# EAGLE board CT_schematic (EAGLE 7.6.0)

Size 100 x 80 mm. Coordinates in mm from the lower left corner, seen from the top.
Outline: 0,0 100,0 100,80 0,80 0,0
Copper layers (1*16): Top 0.035mm / dielectric 1.5mm / Bottom 0.035mm
Design rules "default": minimum track width 10mil, minimum drill 24mil, track to track 8mil, track to pad 8mil, pad to pad 8mil, via to via 8mil, smd to smd 8mil, copper to edge 40mil, drill to drill 8mil, minimum pad ring 10mil, minimum via ring 8mil, stop-mask expansion 4mil, vias tented up to drill 0mil, thermal gap 10mil

## Footprints (pad centres in the part's own frame; a part is rotated, then mirrored left to right if it is on the bottom)
C0603 = smd 0.8 x 0.8: 1 -0.762,0; 2 0.762,0
C0402 = smd 0.5 x 0.5: 1 -0.508,0; 2 0.508,0
C0805 = smd 1.2 x 1.3: 1 -1.016,0; 2 1.016,0
C1210 = smd 1.2 x 2.5: 1 -1.524,0; 2 1.524,0
C1206 = smd 1.3 x 1.6: 1 -1.524,0; 2 1.524,0
L0603 = smd 0.8 x 0.8: 1 -0.762,0; 2 0.762,0
DR1040 = smd 1.6 x 3.2: 1 -4.458,0; 2 4.458,0
L1210 = smd 1.2 x 2.5: 1 -1.524,0; 2 1.524,0
R0603 = smd 0.8 x 0.8: 1 -0.762,0; 2 0.762,0
UFQFPN48 = smd 0.559 x 0.305: 1 -3.375,2.751; 2 -3.375,2.251; 3 -3.375,1.75; 4 -3.375,1.25; 5 -3.375,0.75; 6 -3.375,0.25; 7 -3.375,-0.25; 8 -3.375,-0.75; 9 -3.375,-1.25; 10 -3.375,-1.75; 11 -3.375,-2.251; 12 -3.375,-2.751; 25 3.375,-2.751; 26 3.375,-2.251; 27 3.375,-1.75; 28 3.375,-1.25; 29 3.375,-0.75; 30 3.375,-0.25; 31 3.375,0.25; 32 3.375,0.75; 33 3.375,1.25; 34 3.375,1.75; 35 3.375,2.251; 36 3.375,2.751 | smd 0.305 x 0.559: 13 -2.751,-3.375; 14 -2.251,-3.375; 15 -1.75,-3.375; 16 -1.25,-3.375; 17 -0.75,-3.375; 18 -0.25,-3.375; 19 0.25,-3.375; 20 0.75,-3.375; 21 1.25,-3.375; 22 1.75,-3.375; 23 2.251,-3.375; 24 2.751,-3.375; 37 2.751,3.375; 38 2.251,3.375; 39 1.75,3.375; 40 1.25,3.375; 41 0.75,3.375; 42 0.25,3.375; 43 -0.25,3.375; 44 -0.75,3.375; 45 -1.25,3.375; 46 -1.75,3.375; 47 -2.251,3.375; 48 -2.751,3.375 | smd 5.588 x 5.588: 49 0,0
SOIC-8 = smd 1.6 x 0.6: 1 -2.7,1.905 | smd 1.55 x 0.6: 2 -2.7,0.635; 3 -2.7,-0.635; 4 -2.7,-1.905; 5 2.7,-1.905; 6 2.7,-0.635; 7 2.7,0.635; 8 2.7,1.905
TDFN-8/6MM = smd 0.3 x 0.75: 1 0,0; 2 0.5,0; 3 1,0; 4 1.5,0; 5 1.5,3; 6 1,3; 7 0.5,3; 8 0,3
182-009-MALE = drill 1.194 pad 1.524 octagon: 1 -5.537,10.923; 2 -2.769,10.923; 3 0,10.923; 4 2.769,10.923; 5 5.537,10.923; 6 -4.153,8.08; 7 -1.384,8.08; 8 1.384,8.08; 9 4.153,8.08 | hole 3.048: -12.446,9.501; 12.446,9.501
DFN-6 = smd 0.805 x 0.3: 1 -0.952,0.5; 2 -0.952,0; 3 -0.952,-0.5; 4 0.952,-0.5; 5 0.952,0; 6 0.952,0.5 | smd 0.61 x 1.42: 7 0,0
ABS07-32.768KHZ-7-T = smd 1.1 x 2.4: 1 -2.5,0; 2 0,0
ABLS-25.000MHZ-B2F-T = smd 5.6 x 2.8: 1 -3.81,0; 2 5.69,0
TSOT-23-5 = smd 1.3 x 0.62: 1 -1.31,0.95; 2 -1.31,0; 3 -1.31,-0.95; 4 1.31,-0.95; 5 1.31,0.95
DFN-8_DDB = smd 0.805 x 0.3: 1 -0.952,0.75; 2 -0.952,0.25; 3 -0.952,-0.25; 4 -0.952,-0.75; 5 0.952,-0.75; 6 0.952,-0.25; 7 0.952,0.25; 8 0.952,0.75 | smd 0.61 x 2.2: 9 0,0
DFN8_2X3MC = smd 0.813 x 0.305: 1 -1.398,0.75; 2 -1.398,0.25; 3 -1.398,-0.25; 4 -1.398,-0.75; 5 1.398,-0.75; 6 1.398,-0.25; 7 1.398,0.25; 8 1.398,0.75 | smd 1.753 x 1.549: 9 0,0
JST-2-SMD = smd 1 x 4.6: 1 -1,-3.7; 2 1,-3.7 | smd 1.6 x 3.4: NC1 -3.4,1.5; NC2 3.4,1.5
FCI_10118193-0001LF = smd 0.4 x 1.35: 1 -1.3,2.675; 2 -0.65,2.675; 3 0,2.675; 4 0.65,2.675; 5 1.3,2.675 | smd 1.6 x 1.4: 6 -3.2,2.45; 7 3.2,2.45 | smd 1.9 x 1.9: 8 -1.2,0; 9 1.2,0 | hole 0.5: -3.3,0; 3.3,0
SON-6 = smd 0.55 x 0.3: 1 -0.355,0.5 | smd 0.52 x 0.3: 2 -0.37,0; 3 -0.37,-0.5; 4 0.37,-0.5; 5 0.37,0; 6 0.37,0.5
SW_4-1437565-2 = smd 1.4 x 2.1: 1 -2.23,4.55; 2 -2.23,-4.55; 3 2.23,4.55; 4 2.23,-4.55
LGM67K-G1J2-24-Z = smd 0.8 x 1.4: A -2,0; C 0,0
NC7SZ125M5X = smd 1.3 x 0.7: 1 -1.3,0.95; 2 -1.3,0; 3 -1.3,-0.95; 4 1.3,-0.95; 5 1.3,0.95

## Placement (x,y rotation side)
C1  1e-06  [C0603]  -40.64,64.77 0 top  (outside the outline)
C2  1e-07  [C0603]  -44.45,64.77 0 top  (outside the outline)
C3  1e-07  [C0603]  -48.26,64.77 0 top  (outside the outline)
C4  1e-07  [C0603]  -52.07,64.77 0 top  (outside the outline)
C5  4.7e-06  [C0603]  -29.21,64.77 0 top  (outside the outline)
C6  1e-07  [C0603]  -55.88,64.77 0 top  (outside the outline)
C7  1e-07  [C0603]  -59.69,64.77 0 top  (outside the outline)
C8  1e-08  [C0603]  -63.5,64.77 0 top  (outside the outline)
C9  1e-06  [C0603]  -67.31,64.77 0 top  (outside the outline)
C10  1e-11  [C0402]  -57.15,69.85 0 top  (outside the outline)
C11  1e-11  [C0402]  -60.96,69.85 0 top  (outside the outline)
C12  1e-11  [C0402]  -64.77,69.85 0 top  (outside the outline)
C13  1e-11  [C0402]  -68.58,69.85 0 top  (outside the outline)
C14  1e-08  [C0402]  -72.39,69.85 0 top  (outside the outline)
C15  1e-08  [C0402]  -15.24,74.93 0 top  (outside the outline)
C16  1e-08  [C0402]  -19.05,74.93 0 top  (outside the outline)
C17  1e-06  [C0603]  -71.12,64.77 0 top  (outside the outline)
C18  1e-06  [C0603]  -15.24,69.85 0 top  (outside the outline)
C19  1e-07  [C0402]  -22.86,74.93 0 top  (outside the outline)
C20  1e-05  [C0805]  -40.64,53.34 0 top  (outside the outline)
C21  1e-05  [C0805]  -45.72,53.34 0 top  (outside the outline)
C22  1e-05  [C1210]  -69.85,45.72 0 top  (outside the outline)
C23  2.2e-06  [C0603]  -33.02,64.77 0 top  (outside the outline)
C24  2.2e-07  [C0603]  -36.83,64.77 0 top  (outside the outline)
C25  1e-07  [C0402]  -26.67,74.93 0 top  (outside the outline)
C26  1e-05  [C1206]  -22.86,53.34 0 top  (outside the outline)
C27  1e-05  [C1206]  -29.21,53.34 0 top  (outside the outline)
C28  1e-08  [C0402]  -30.48,74.93 0 top  (outside the outline)
F1  240.0  [L0603]  -19.05,69.85 0 top  (outside the outline)
I1  3.8e-06  [DR1040]  -19.05,27.94 0 top  (outside the outline)
I2  1e-05  [L1210]  -16.51,53.34 0 top  (outside the outline)
R1  10000.0  [R0603]  -30.48,59.69 0 top  (outside the outline)
R2  1000.0  [R0603]  -22.86,69.85 0 top  (outside the outline)
R3  1270.0  [R0603]  -26.67,69.85 0 top  (outside the outline)
R4  4700.0  [R0603]  -30.48,69.85 0 top  (outside the outline)
R5  2200.0  [R0603]  -34.29,69.85 0 top  (outside the outline)
R6  2200.0  [R0603]  -38.1,69.85 0 top  (outside the outline)
R7  2200.0  [R0603]  -41.91,69.85 0 top  (outside the outline)
R8  2200.0  [R0603]  -45.72,69.85 0 top  (outside the outline)
R9  10000.0  [R0603]  -35.56,59.69 0 top  (outside the outline)
R10  10000.0  [R0603]  -40.64,59.69 0 top  (outside the outline)
R11  10000.0  [R0603]  -45.72,59.69 0 top  (outside the outline)
R12  10000.0  [R0603]  -50.8,59.69 0 top  (outside the outline)
R13  10000.0  [R0603]  -55.88,59.69 0 top  (outside the outline)
R14  10000.0  [R0603]  -60.96,59.69 0 top  (outside the outline)
R15  10000.0  [R0603]  -66.04,59.69 0 top  (outside the outline)
R16  120.0  [R0603]  -49.53,69.85 0 top  (outside the outline)
R17  309473.68421053  [R0603]  -60.96,53.34 0 top  (outside the outline)
R18  1000000.0  [R0603]  -66.04,53.34 0 top  (outside the outline)
R19  100000.0  [R0603]  -71.12,53.34 0 top  (outside the outline)
R20  560000.0  [R0603]  -15.24,59.69 0 top  (outside the outline)
R21  10000.0  [R0603]  -71.12,59.69 0 top  (outside the outline)
R22  10000.0  [R0603]  -15.24,64.77 0 top  (outside the outline)
R23  18000.0  [R0603]  -20.32,64.77 0 top  (outside the outline)
R24  470000.0  [R0603]  -20.32,59.69 0 top  (outside the outline)
R25  120000.0  [R0603]  -25.4,59.69 0 top  (outside the outline)
R26  2000.0  [R0603]  -53.34,69.85 0 top  (outside the outline)
R27  10000.0  [R0603]  -25.4,64.77 0 top  (outside the outline)
U1  stm32f091cbu7  [UFQFPN48]  -46.99,38.1 0 top  (outside the outline)
U2  AT25160B-SSHL-T  [SOIC-8]  -66.04,27.94 0 top  (outside the outline)
U3  AT25256B-SSHL-T  [SOIC-8]  -24.13,38.1 0 top  (outside the outline)
U4  24AA08T-I/MNY  [TDFN-8/6MM]  -50.8,26.67 0 top  (outside the outline)
U5  MCP2562-E/SN  [SOIC-8]  -38.1,38.1 0 top  (outside the outline)
U6  182-009-113R531  [182-009-MALE]  -36.83,6.35 0 top  (outside the outline)
U7  Si7051-A20-IM  [DFN-6]  -40.64,73.66 0 top  (outside the outline)
U8  ABS07-32.768KHZ-7-T  [ABS07-32.768KHZ-7-T]  -49.53,46.99 0 top  (outside the outline)
U9  ABLS-25.000MHZ-B2F-T  [ABLS-25.000MHZ-B2F-T]  -26.67,46.99 0 top  (outside the outline)
U10  ltc3406es5  [TSOT-23-5]  -50.8,53.34 0 top  (outside the outline)
U11  LT3494AEDDB#TRMPBF  [DFN-8_DDB]  -34.29,74.93 0 top  (outside the outline)
U12  MCP73831T-2ACI/MC  [DFN8_2X3MC]  -49.53,73.66 0 top  (outside the outline)
U13  S2B-PH-SM4-TB(LF)(SN)  [JST-2-SMD]  -34.29,29.21 0 top  (outside the outline)
U14  10118193-0001LF  [FCI_10118193-0001LF]  -58.42,36.83 0 top  (outside the outline)
U15  TPS3895ADRYR  [SON-6]  -43.18,73.66 0 top  (outside the outline)
U16  4-1437565-2  [SW_4-1437565-2]  -67.31,6.35 0 top  (outside the outline)
U17  Q65110A2395  [LGM67K-G1J2-24-Z]  -58.42,45.72 0 top  (outside the outline)
U18  nc7sz125m5x  [NC7SZ125M5X]  -34.29,53.34 0 top  (outside the outline)

## Library data of the parts
C1-C28 F1 I1 I2 R1-R27 U1-U18 = circuit_tree

## Nets
CLK_CRYSTAL_U1_3: C10.1 U1.3 U8.1
CLK_CRYSTAL_U1_4: C11.1 U1.4 U8.2
CLK_CRYSTAL_U1_5: C12.1 U1.5 U9.1
CLK_CRYSTAL_U1_6: C13.1 U1.6 U9.2
GND: C1.2 C2.2 C3.2 C4.2 C5.2 C6.2 C7.2 C8.2 C9.2 C10.2 C11.2 C12.2 C13.2 C14.2 C15.2 C16.2 C17.2 C18.2 C19.2 C20.2 C21.1 C21.2 C22.2 C23.2 C24.2 C25.2 C26.2 C27.2 C28.2 R2.2 R9.2 R17.2 R23.2 R25.2 R26.2 U1.8 U1.23 U1.35 U1.47 U1.49 U2.4 U3.4 U4.4 U5.2 U5.8 U6.5 U7.2 U7.7 U10.2 U11.2 U11.9 U12.6 U12.9 U13.2 U14.5 U14.6 U14.7 U14.8 U14.9 U15.2 U17.C U18.1 U18.3
INPUT_USBPOWER_5V: C26.1 R27.2 U12.1 U12.2 U14.1
NET_U1_7: R4.1 U1.7 U18.4
NET_U1_9: C8.1 C9.1 F1.1 U1.9
NET_U1_22: R8.1 U1.22 U4.5
NET_U1_26: R7.1 U1.26 U4.6
NET_U1_30: R5.1 U1.30 U7.6
NET_U1_31: R6.1 U1.31 U7.1
NET_U1_44: R9.1 U1.44
NET_U1_45: R3.1 U1.45 U17.A
NET_U1_46: R1.1 U1.46 U16.3 U16.4
NET_U2_3: R10.1 U2.3
NET_U2_7: R12.1 U2.7
NET_U3_3: R13.1 U3.3
NET_U3_7: R15.1 U3.7
NET_U5_6: R16.2 U5.6
NET_U6_2: R16.2 U5.6 U6.2
NET_U6_3: R16.1 U5.7 U6.3
NET_U10_1: U10.1
NET_U10_3: I1.1 U10.3
NET_U10_5: R17.1 R18.1 U10.5
NET_U10_ATNET_3: I1.2 R18.2
NET_U11_1: I2.1 U11.1
NET_U11_5: R19.1 U11.5
NET_U11_6: R20.1 U11.6
NET_U11_8: C24.1 U11.8
NET_U12_5: R27.1 U12.5
NET_U12_8: R26.1 U12.8
NET_U15_1: R22.1 R23.1 U15.1
NET_U15_3: R24.2 R25.1 U15.3
NET_U15_4: R21.1 U15.4 U18.2
NET_U16_1: R2.1 U16.1 U16.2
PROC_CAN_RX: U1.32 U5.4
PROC_CAN_TX: U1.33 U5.1
PROC_SPI1_MISO: U1.16 U3.2
PROC_SPI1_MOSI: U1.17 U3.5
PROC_SPI1_NSS: R14.1 U1.14 U3.1
PROC_SPI1_SCK: U1.15 U3.6
PROC_SPI2_MISO: U1.27 U2.2
PROC_SPI2_MOSI: U1.28 U2.5
PROC_SPI2_NSS: R11.1 U1.25 U2.1
PROC_SPI2_SCK: U1.21 U2.6
VCC_S1_3V7: C20.1 C22.1 C27.1 I2.2 R19.2 U10.4 U11.3 U11.4 U12.3 U12.4 U13.1
VCC_TIER1_2V5: C1.1 C2.1 C3.1 C4.1 C5.1 C6.1 C7.1 C14.1 C15.1 C16.1 C18.1 C19.1 C21.2 C25.1 C28.1 F1.2 I1.2 R1.2 R3.2 R4.2 R5.2 R6.2 R7.2 R8.2 R10.2 R11.2 R12.2 R13.2 R14.2 R15.2 R18.2 R21.2 R22.2 R24.1 U1.1 U1.24 U1.36 U1.48 U2.8 U3.8 U4.7 U4.8 U5.5 U7.5 U15.6 U18.5
VCC_TIER1_5V0: C17.1 C23.1 R20.2 U5.3 U11.7

## Tracks (layer width: path | path; a pad name or v marks a point on that pad's centre or on a via)
CLK_CRYSTAL_U1_3  (2 unrouted)
CLK_CRYSTAL_U1_4  (2 unrouted)
CLK_CRYSTAL_U1_5  (2 unrouted)
CLK_CRYSTAL_U1_6  (2 unrouted)
GND  (62 unrouted)
INPUT_USBPOWER_5V  (4 unrouted)
NET_U1_7  (2 unrouted)
NET_U1_9  (3 unrouted)
NET_U1_22  (2 unrouted)
NET_U1_26  (2 unrouted)
NET_U1_30  (2 unrouted)
NET_U1_31  (2 unrouted)
NET_U1_44  (1 unrouted)
NET_U1_45  (2 unrouted)
NET_U1_46  (3 unrouted)
NET_U2_3  (1 unrouted)
NET_U2_7  (1 unrouted)
NET_U3_3  (1 unrouted)
NET_U3_7  (1 unrouted)
NET_U5_6  (1 unrouted)
NET_U6_2  (2 unrouted)
NET_U6_3  (2 unrouted)
NET_U10_3  (1 unrouted)
NET_U10_5  (2 unrouted)
NET_U10_ATNET_3  (1 unrouted)
NET_U11_1  (1 unrouted)
NET_U11_5  (1 unrouted)
NET_U11_6  (1 unrouted)
NET_U11_8  (1 unrouted)
NET_U12_5  (1 unrouted)
NET_U12_8  (1 unrouted)
NET_U15_1  (2 unrouted)
NET_U15_3  (2 unrouted)
NET_U15_4  (2 unrouted)
NET_U16_1  (2 unrouted)
PROC_CAN_RX  (1 unrouted)
PROC_CAN_TX  (1 unrouted)
PROC_SPI1_MISO  (1 unrouted)
PROC_SPI1_MOSI  (1 unrouted)
PROC_SPI1_NSS  (2 unrouted)
PROC_SPI1_SCK  (1 unrouted)
PROC_SPI2_MISO  (1 unrouted)
PROC_SPI2_MOSI  (1 unrouted)
PROC_SPI2_NSS  (2 unrouted)
PROC_SPI2_SCK  (1 unrouted)
VCC_S1_3V7  (10 unrouted)
VCC_TIER1_2V5  (45 unrouted)
VCC_TIER1_5V0  (4 unrouted)